# EAGLE board switchv1 (EAGLE 9.2.2)
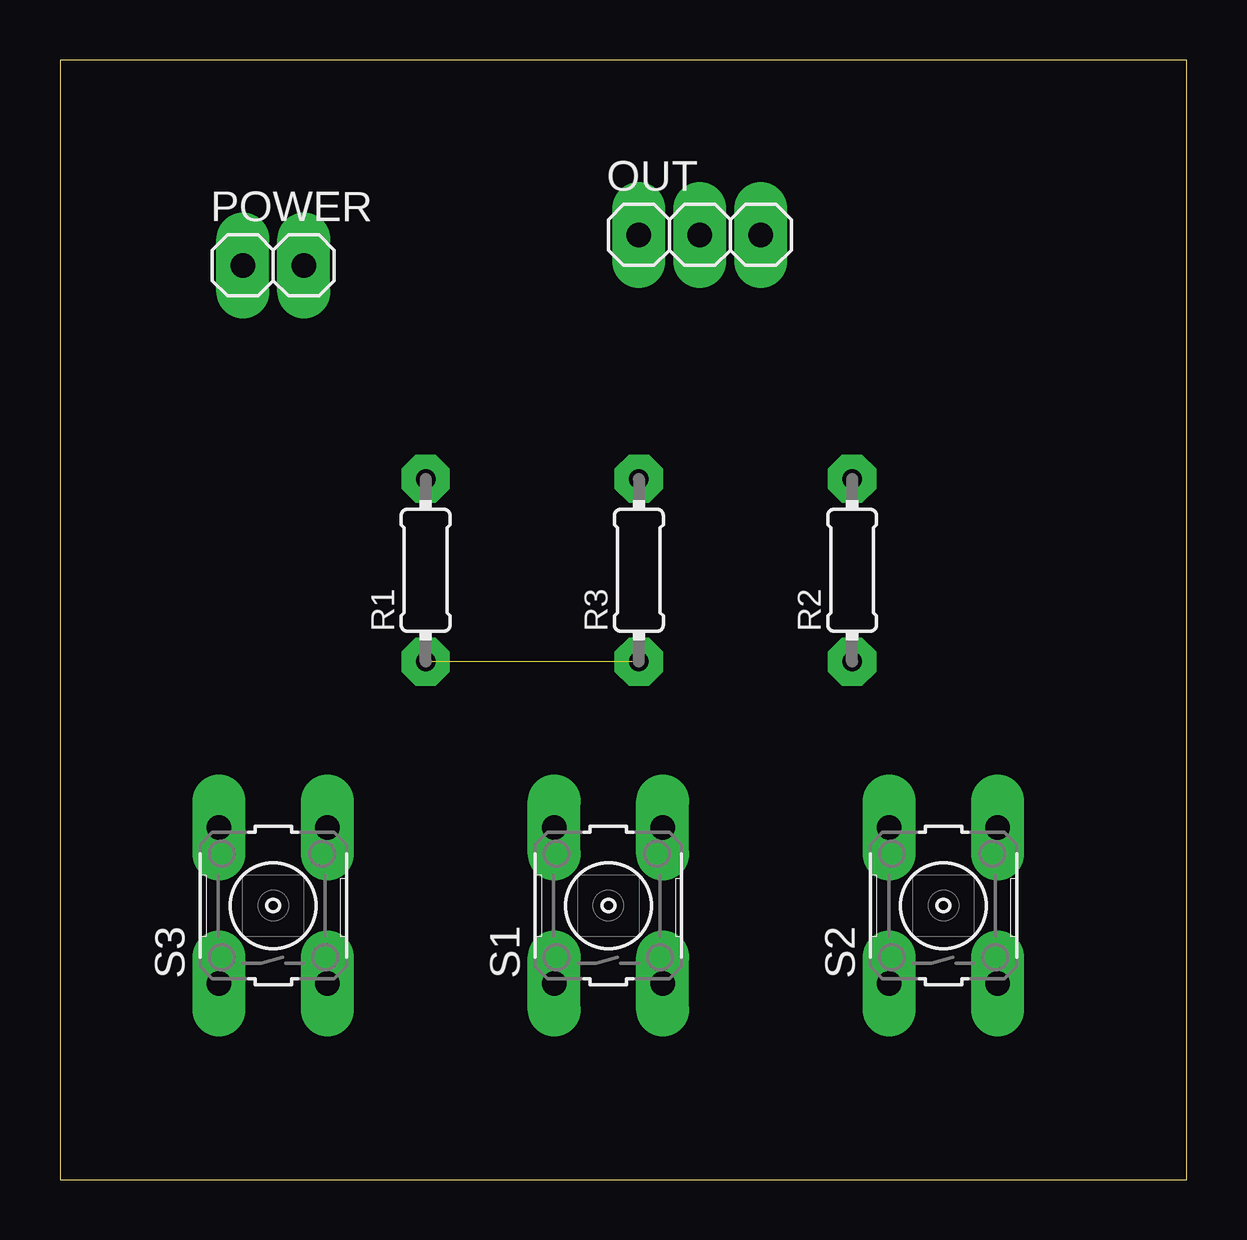
[diagram p0: board, top side]
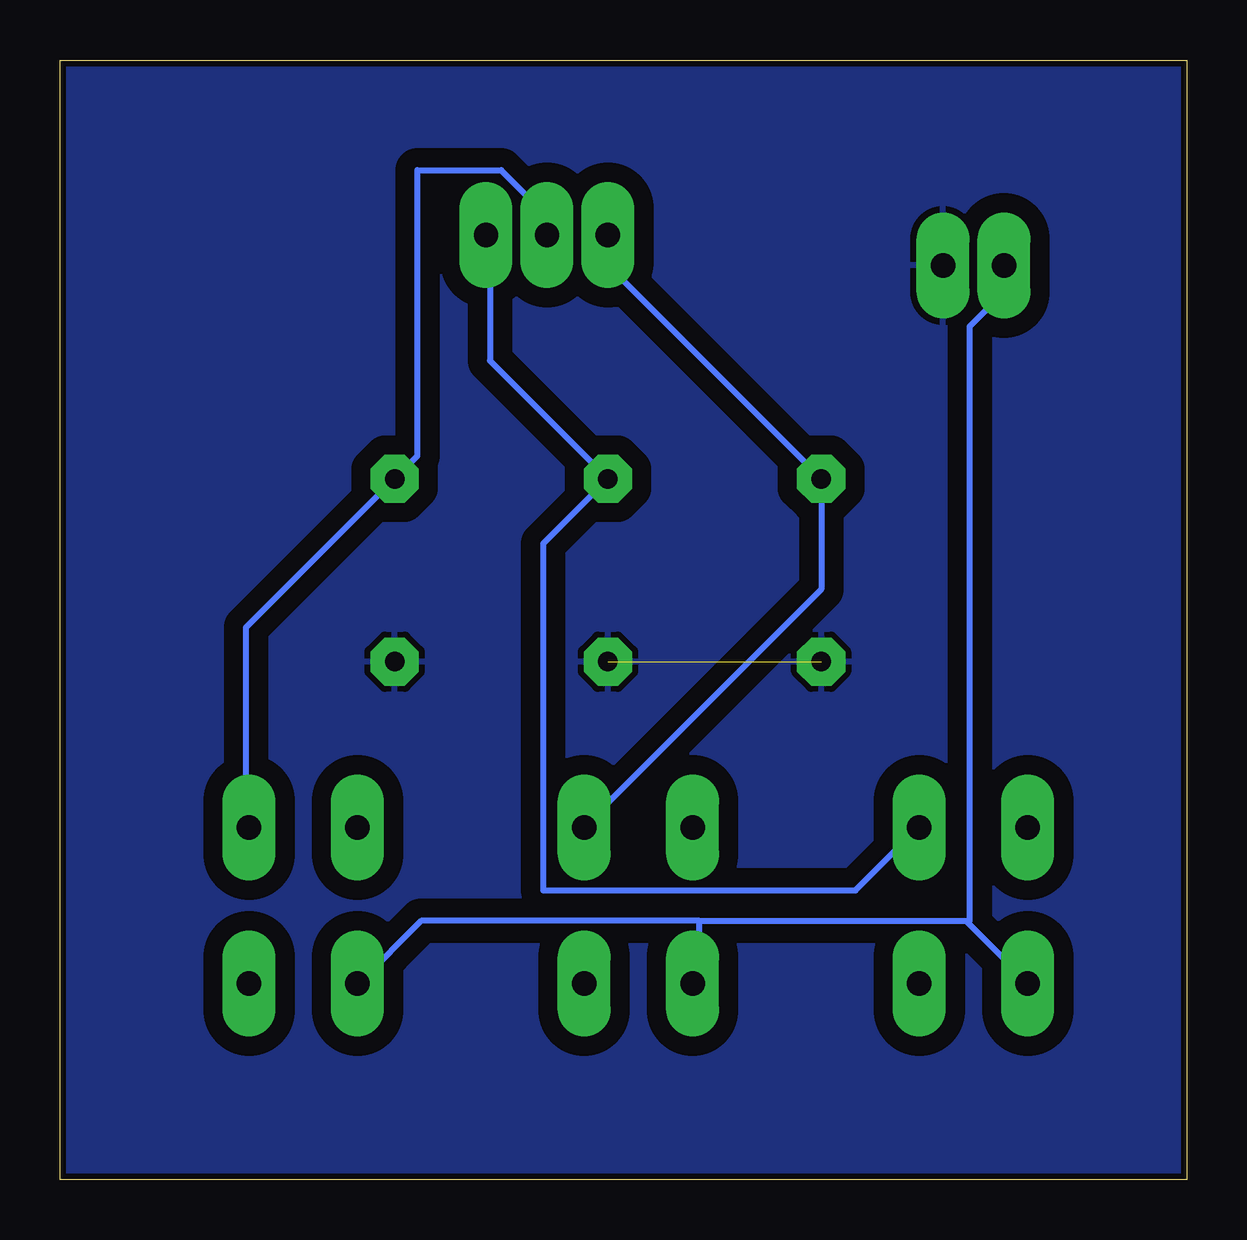
[diagram p1: board, bottom side, seen from below]

Size 46.97 x 46.66 mm. Coordinates in mm from the lower left corner, seen from the top.
Outline: 0,0 46.97,0 46.97,46.66 0,46.66 0,0
Copper layers (1*16): Top 0.035mm / dielectric 1.5mm / Bottom 0.035mm
Design rules "hobby": minimum track width 0.8mm, minimum drill 0.8mm, track to track 0.8mm, track to pad 0.8mm, pad to pad 0.45mm, via to via 0.8mm, smd to smd 8mil, copper to edge 10mil, drill to drill 8mil, minimum pad ring 0.6mm, minimum via ring 0.6mm, stop-mask expansion 0mil, vias tented up to drill 0mil, thermal gap 10mil

## Footprints (pad centres in the part's own frame; a part is rotated, then mirrored left to right if it is on the bottom)
1X03 = drill 1.016 long: 1 -2.54,0; 2 0,0; 3 2.54,0
1X02 = drill 1.016 long: 1 -1.27,0; 2 1.27,0
0204/7 = drill 0.813 pad 1.676 octagon: 1 -3.81,0; 2 3.81,0
B3F-10XX = drill 1.016 long: 1 -3.251,2.261; 2 3.251,2.261; 3 -3.251,-2.261; 4 3.251,-2.261

## Placement (x,y rotation side)
OUT  To GPIO  [1X03]  26.67,39.37 0 top
POWER  5vMax  [1X02]  8.89,38.1 0 top
R1  10k  [0204/7]  15.24,25.4 90 top
R2  10k  [0204/7]  33.02,25.4 90 top
R3  10k  [0204/7]  24.13,25.4 90 top
S1  Button a  [B3F-10XX]  22.86,11.43 90 top
S2  Button b  [B3F-10XX]  36.83,11.43 90 top
S3  Button c  [B3F-10XX]  8.89,11.43 90 top

## Library data of the parts
OUT POWER = pinhead
R1-R3 = adafruit
S1-S3 = switch-omron; MPN: B3F-1000; OC_FARNELL: 176432; OC_NEWARK: 36M3542

## Nets
GND: POWER.2 R1.1 R2.1 R3.1
N$1: OUT.3 R3.2 S3.4
N$2: OUT.2 R2.2 S2.4
N$3: OUT.1 R1.2 S1.4
VCC: POWER.1 S1.1 S2.1 S3.1

## Tracks (layer width: path | path; a pad name or v marks a point on that pad's centre or on a via)
GND  (1 unrouted)
  pour Bottom: 0,46.99 46.99,46.99 46.99,0 0,0 0,45.72
N$1
  Bottom 0.254: OUT.3 29.05,39.21 29.05,34.13 R3.2 24.29,29.21 24.29,29.05 26.83,26.51 26.83,12.06 13.81,12.06 11.27,14.61 S3.4
N$2
  Bottom 0.254: S2.4 39.21,14.76 39.21,23.02 R2.2 32.07,30.16 32.07,42.07 28.57,42.07 27.3,40.8 27.3,40.01 OUT.2
N$3
  Bottom 0.254: OUT.1 24.13,38.1 R1.2 15.24,24.61 25.08,14.76 S1.4
VCC
  Bottom 0.254: 9.13,10.72 9.21,10.79 20.32,10.79 | 9.13,10.72 6.67,8.26 S3.1 | 20.32,10.79 20.32,8.41 20.48,8.26 S1.1 | 20.32,10.79 31.91,10.79 34.45,8.26 S2.1 | POWER.1 8.26,37.47 8.26,36.35 9.05,35.56 9.05,10.79 9.13,10.72